# Altium PCB RHD2164_USBC.PcbDoc
Units mm, origin at the board's own origin, x right, y up, seen from the top; angles counter-clockwise.
Board outline 26.31 x 34.44 mm, 6 copper layers (Top Layer, Ground Plane 1, Third Layer, Fourth Layer, Ground Plane 2, Bottom Layer), stack 1.484 mm thick; 12 components, 76 nets, 224 pads, 85 vias.
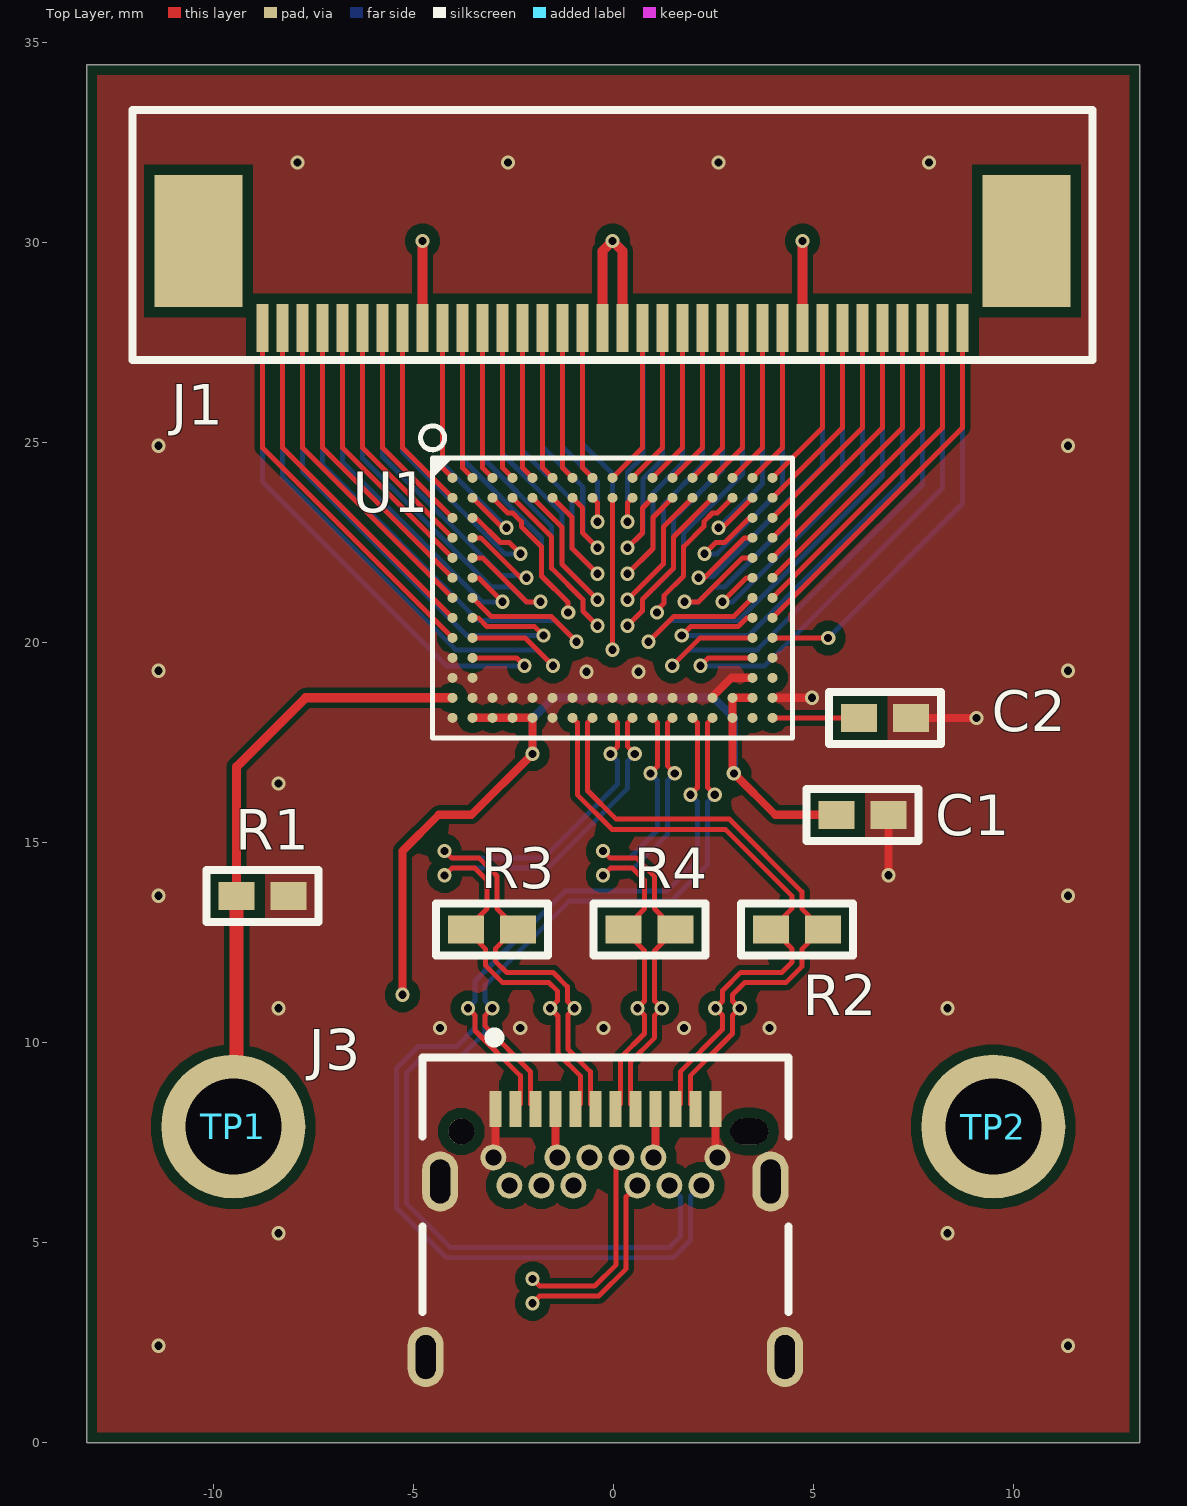
[diagram p0: Top Layer view]
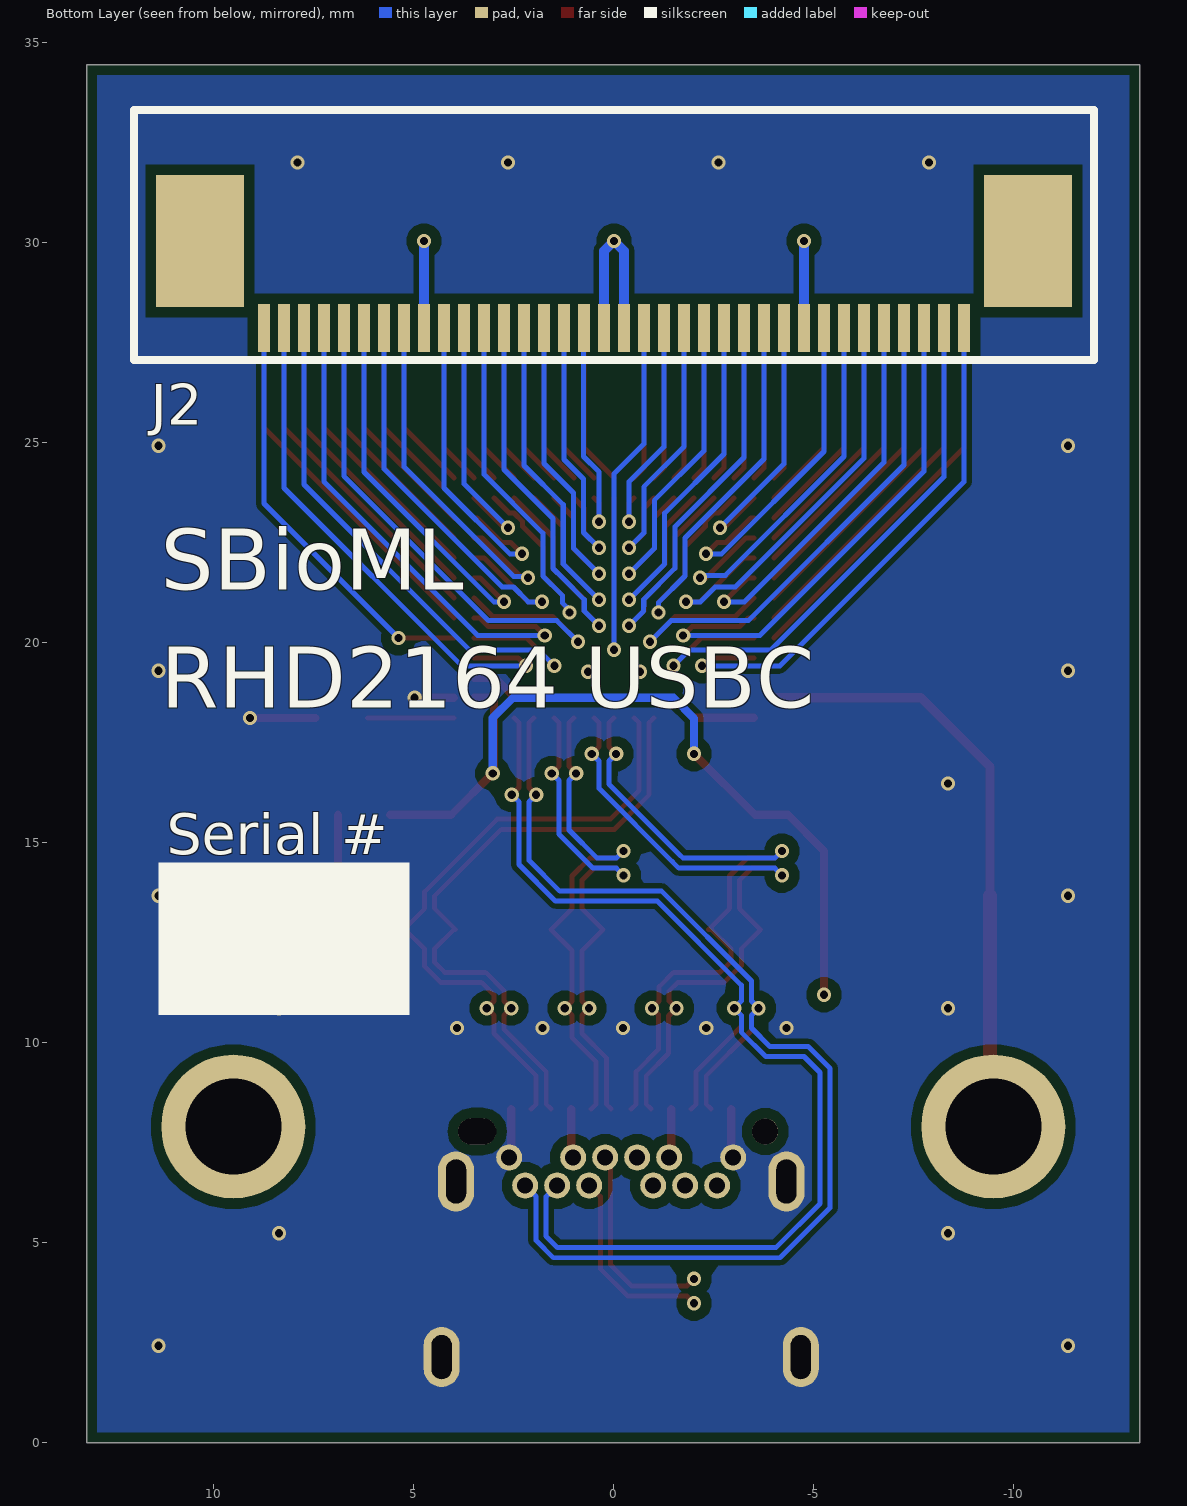
[diagram p1: Bottom Layer view, seen from below]
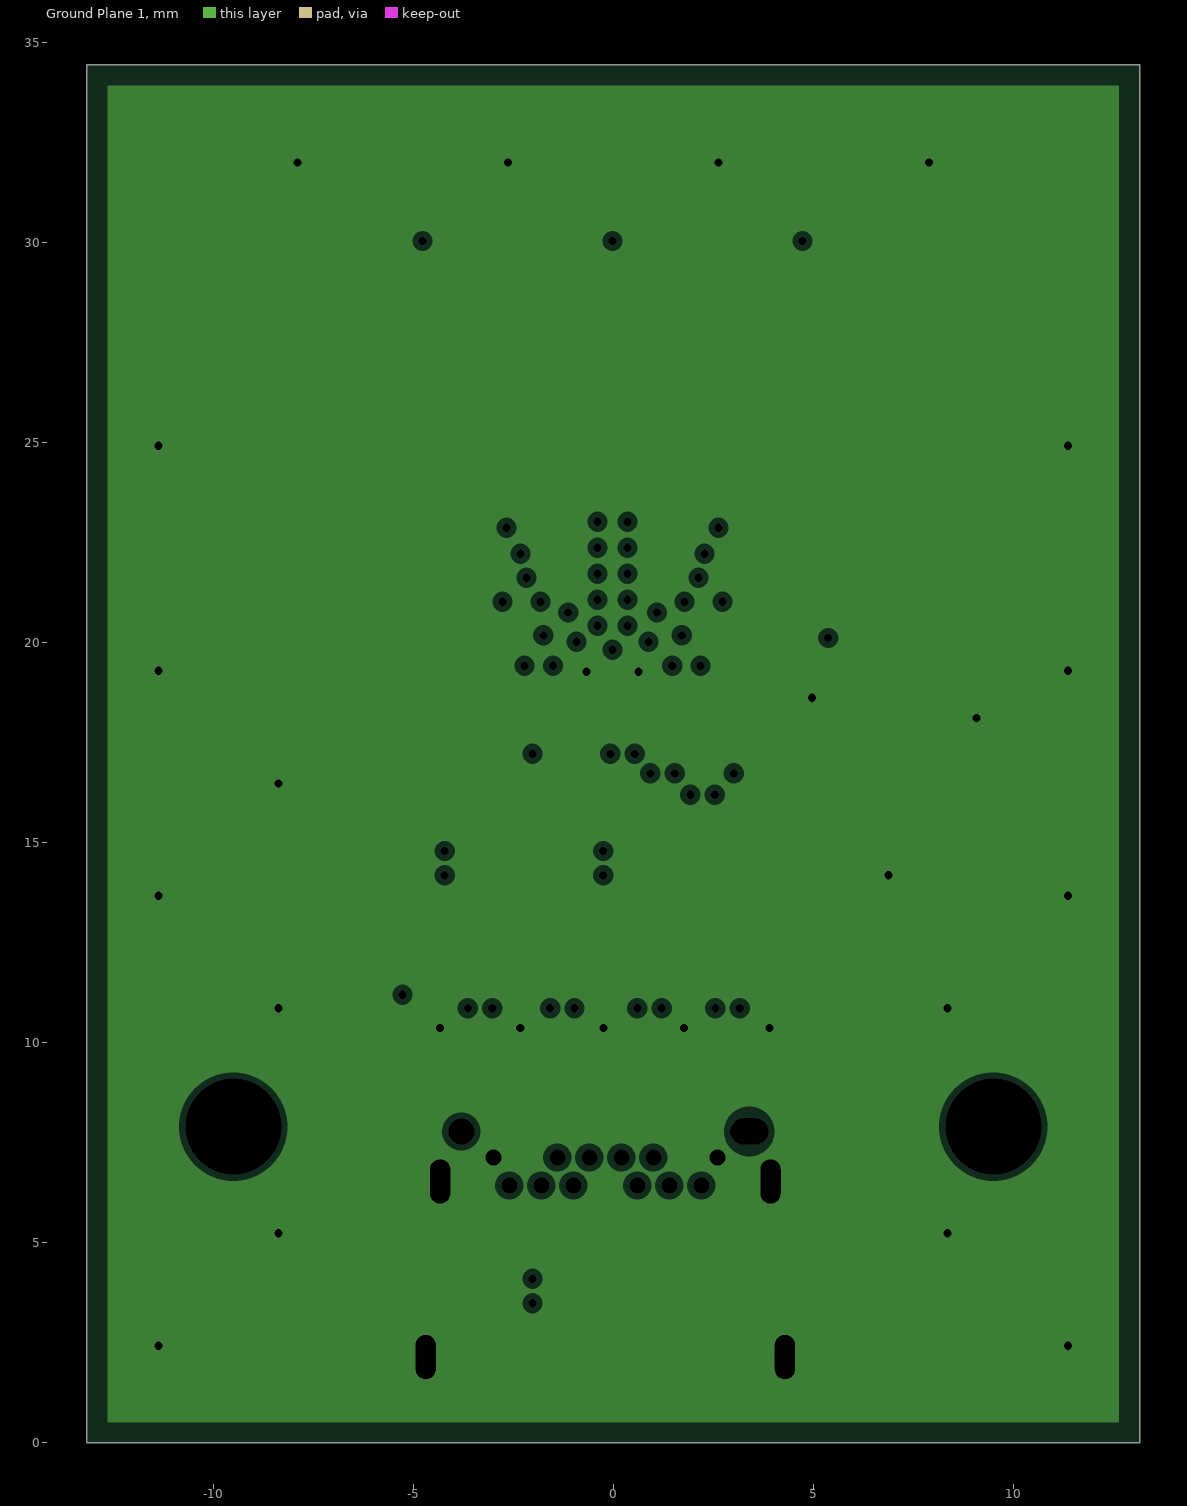
[diagram p2: Ground Plane 1, clearances drawn from the general rule]
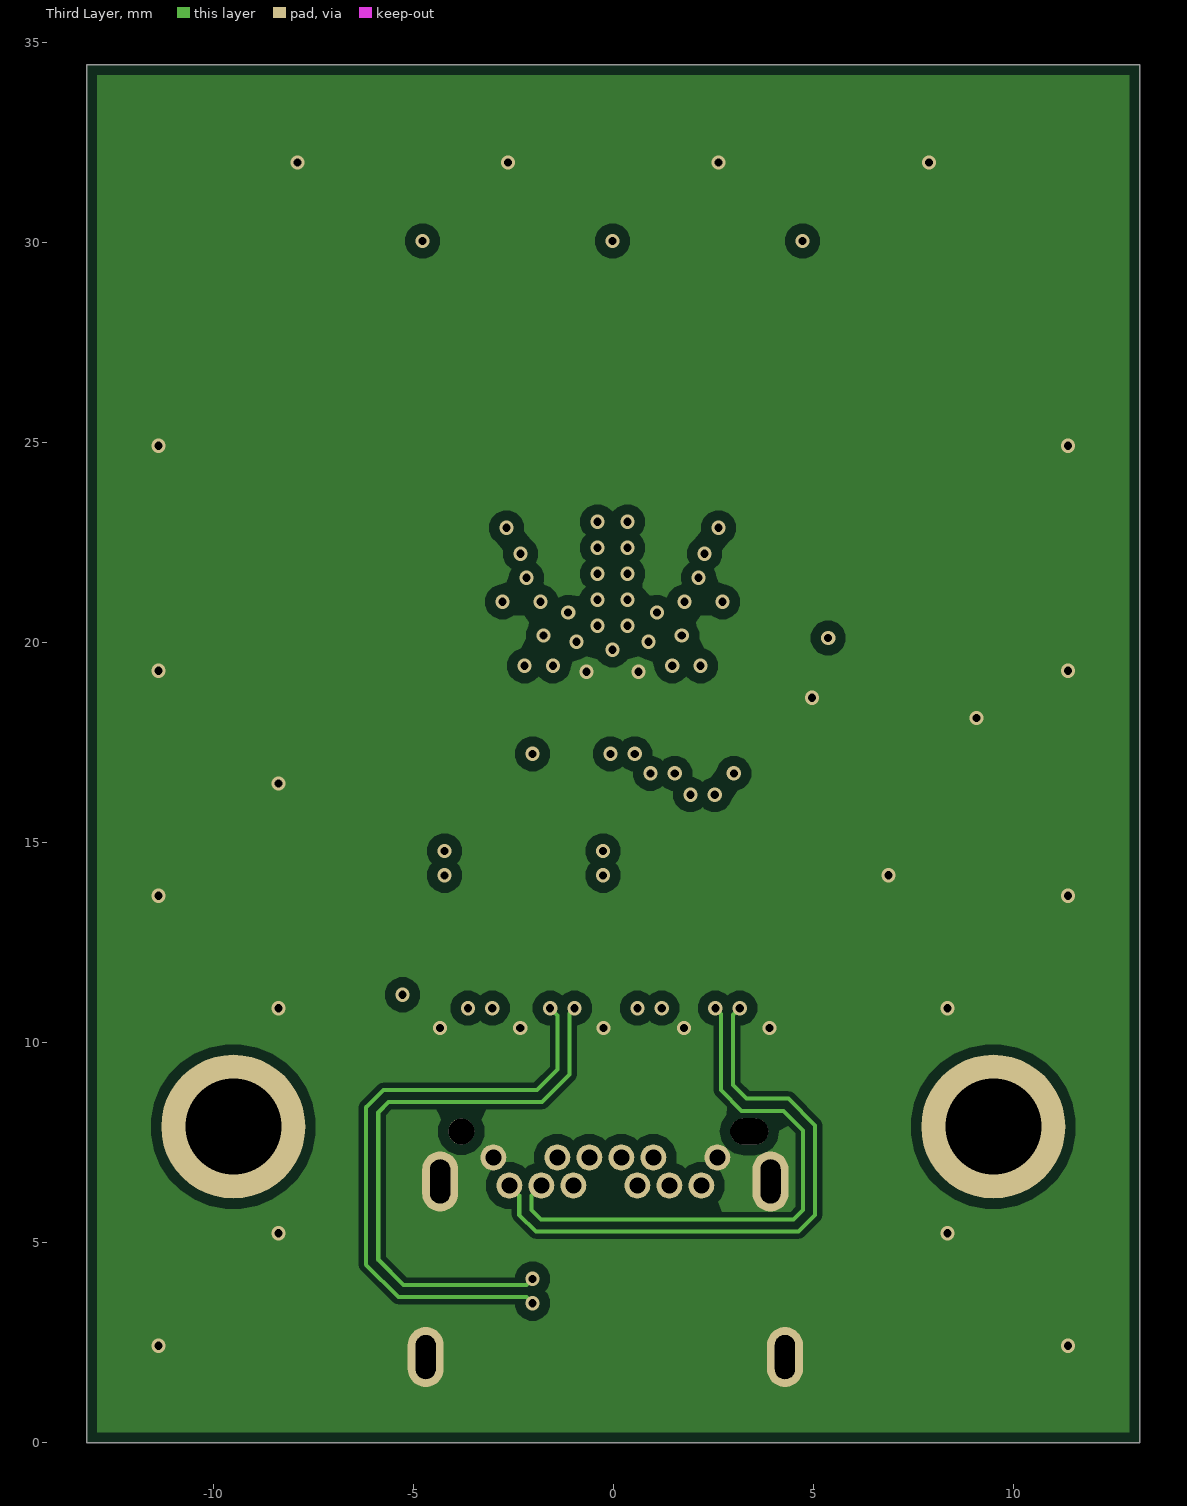
[diagram p3: Third Layer]
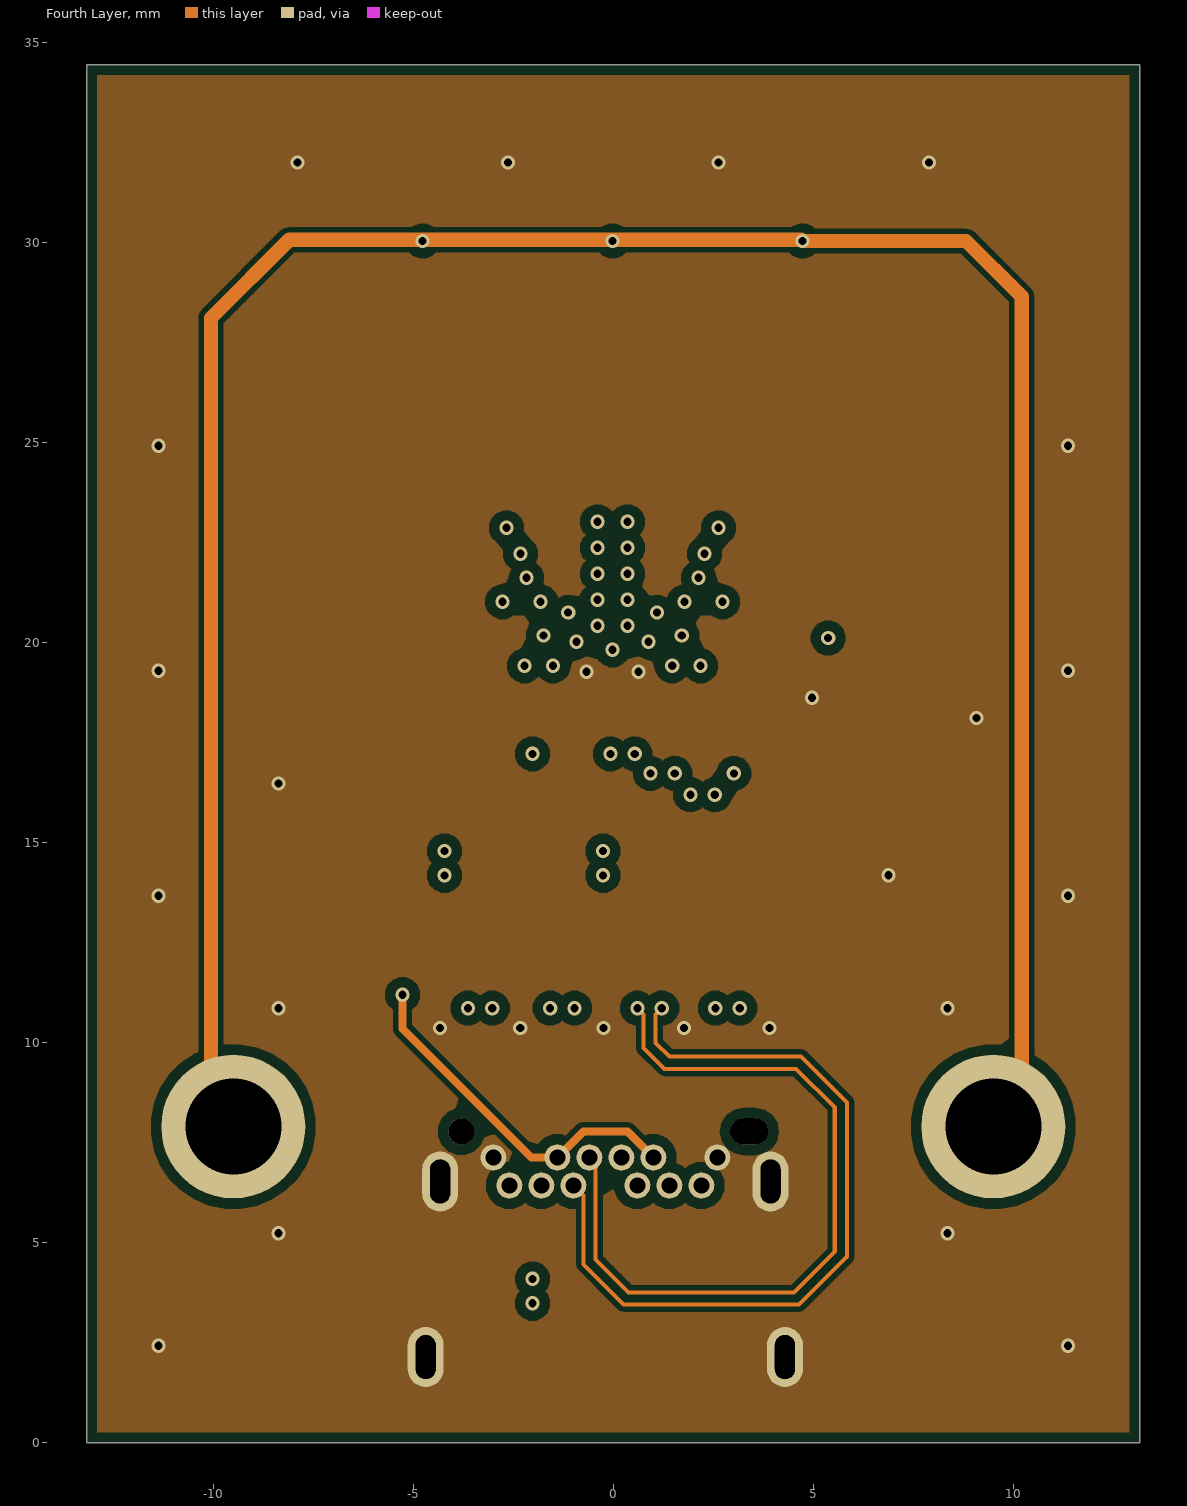
[diagram p4: Fourth Layer]
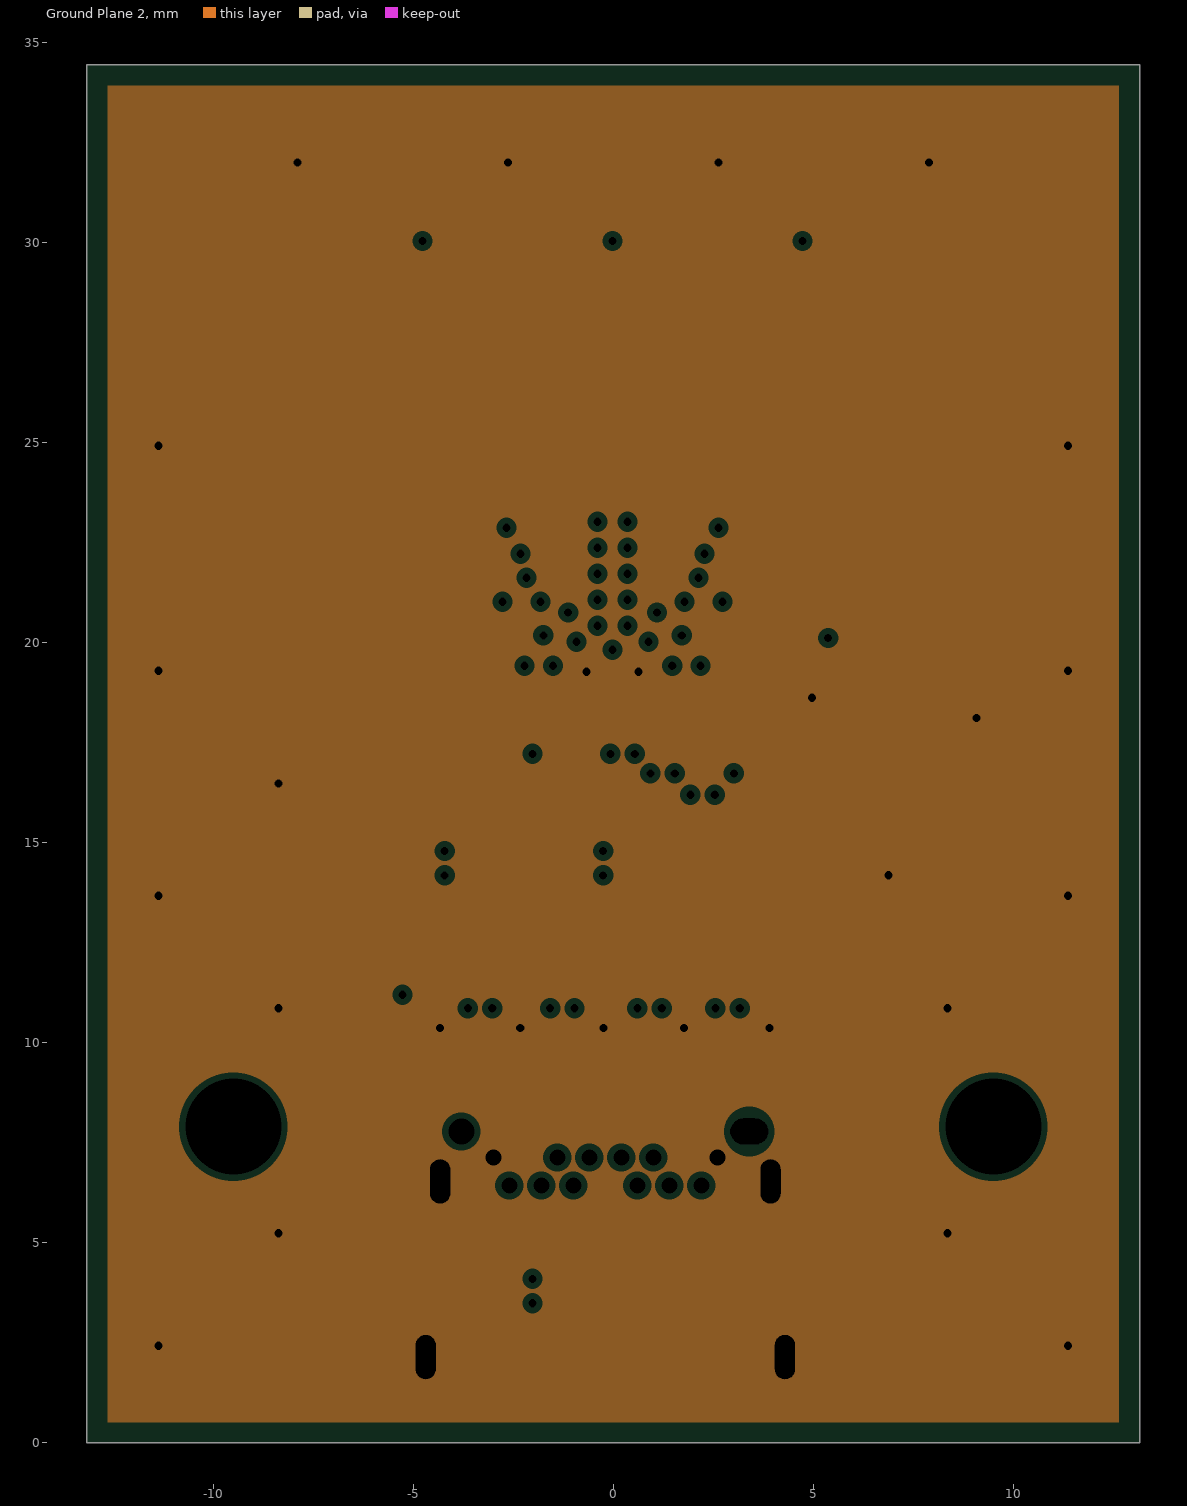
[diagram p5: Ground Plane 2, clearances drawn from the general rule]

## Layer stack, top to bottom
Top Solder: solder mask 0.01, Solder Resist, Dk 3.5
Top Layer: signal copper 0.035
Dielectric 4: prepreg 0.1195, 2116 RC58%, Dk 4.45
Ground Plane 1: plane copper 0.035, net GND
Dielectric 2: core 0.43, Core, Dk 4.6
Third Layer: signal copper 0.035
Dielectric 1: prepreg 0.175, 7628 RC46%, Dk 4.74
Fourth Layer: signal copper 0.035
Dielectric 3: core 0.43, Core, Dk 4.6
Ground Plane 2: plane copper 0.035, net GND
Dielectric 5: prepreg 0.1195, 2116 RC58%, Dk 4.45
Bottom Layer: signal copper 0.035
Bottom Solder: solder mask 0.01, Solder Resist, Dk 3.5

## Board outline
-13.157,0 -13.157,34.442 13.157,34.442 13.157,0

## Design rules (kind name [scope] priority, off if disabled: settings)
AcuteAngle [All] p1: minimum=4.50000000000000E+0001 checktracksonly=FALSE
BoardOutlineClearance [All] p1: gap=0.254 ignorepadtopadclearanceinfootprint=FALSE
Clearance [All] p1: gap=0.254 ignorepadtopadclearanceinfootprint=TRUE except(0.127: Arc-Arc Arc-Track Arc-SMDPad Arc-THPad Arc-Via Arc-Fill Arc-Poly Arc-Region Arc-Text Arc-Hole Track-Track Track-SMDPad Track-THPad Track-Via Track-Fill Track-Poly Track-Region Track-Text Track-Hole)
ComponentClearance [All] p1: gap=0.102 collisioncheckmode=3 verticalgap=0.102 showdistances=FALSE
DiffPairsRouting [All] p1: maxlimit=0.203 minlimit=0.127 mostfreqgap=0.203 toplayer_maxgap=0.127 toplayer_prefgap=0.127 toplayer_minwidth=0.124 toplayer_maxwidth=0.124 toplayer_prefwidth=0.124 midlayer2_mingap=0.203 midlayer2_minwidth=0.102 midlayer2_maxwidth=0.102 midlayer2_prefwidth=0.102 midlayer3_mingap=0.203 midlayer3_minwidth=0.102 midlayer3_maxwidth=0.102 midlayer3_prefwidth=0.102 bottomlayer_maxgap=0.127 bottomlayer_prefgap=0.127 bottomlayer_minwidth=0.124 bottomlayer_maxwidth=0.124 bottomlayer_prefwidth=0.124 impedanceprofiledriven=TRUE impedanceprofileid={EA2CEC0D-C804-4875-A771-53543DD9646E} impedanceprofilevalue=100.000000 maxuncoupledlength=5.08
HoleSize [All] p1: absolutevalues=TRUE maxlimit=25.4 minlimit=0.152 maxpercent=80.000 minpercent=20.000
HoleToHoleClearance [All] p1: gap=0.203 allowstackedmicrovias=FALSE
MatchedLengths [All] p1: tolerance=1.27 checknetsindiffpair=TRUE checkdiffpairvsdiffpair=FALSE checkxsignals=FALSE checkothers=FALSE
MinimumAnnularRing [All] p1: minimumring=0.076
MinimumSolderMaskSliver MinimumSolderMaskSliver_U1 [HasFootprint('RHD2164_BGA')] p1: minsoldermaskwidth=0.025
MinimumSolderMaskSliver [All] p2: minsoldermaskwidth=0.102
PlaneClearance [All] p1: clearance=0.152
PlaneConnect [All] p1: planeconnectstyle=Direct reliefexpansion=0.508 reliefentries=4 reliefconductorwidth=0.254 reliefairgap=0.254
PolygonConnect [All] p1: connectstyle=Direct reliefconductorwidth=0.203 reliefentries=4 polygonreliefangle="90 Angle" airgapwidth=0.102
RoutingVias [All] p1: holewidth=0.203 width=0.356 viastyle="Through Hole" minholewidth=0.152 minwidth=0.356 maxholewidth=0.203 maxwidth=0.356
SilkToSilkClearance [All] p1: silktosilkclearance=0.102
SilkToSolderMaskClearance [IsPad] p1: minsilkscreentomaskgap=0.051 clearancetoexposedcopper=FALSE
SolderMaskExpansion SolderMaskExpansion_Vias [IsVia] p1: expansion=-0.254 istentingtop=TRUE
SolderMaskExpansion [All] p2: expansion=0.102 istentingtop=FALSE
SupplyNets "Schematic Supply Nets_1" [InNet('GND')] p1: voltage=0.000
SupplyNets "Schematic Supply Nets" [InNet('VCC')] p2: voltage=0.000
Width Width_Power [InNetClass('Power')] p1: maxlimit=0.508 minlimit=0.152 preferedwidth=0.203
Width [All] p2: maxlimit=0.381 minlimit=0.127 preferedwidth=0.127 minimp=50.000000 maximp=50.000000 favimp=50.000000
21 further rules are at their usual default settings.

## Classes and differential pairs
component class RHD2164_USBC: C1 C2 J1 J2 J3 R1 R2 R3 R4 U1
differential pair RHD2216_SCLK: +RHD2216_SCLK_P -RHD2216_SCLK_N
differential pair RHD2216_MOSI: +RHD2216_MOSI_P -RHD2216_MOSI_N
differential pair RHD2216_MISO: +RHD2216_MISO_P -RHD2216_MISO_N
differential pair RHD2216_CSN: +RHD2216_CSN_P -RHD2216_CSN_N

## Components (designator, comment, footprint, x,y, rotation, side; value= is the part's Value field where it differs from the comment)
C1 "Value" 0402_CAPACITOR 6.232,15.698 r180 top
C2 "Value" 0402_CAPACITOR 6.795,18.114 r0 top
J1 "3-2492104-6" CON_ZIF_RA_36POS -0.018,27.872 r180 top locked
J2 "3-2492104-6" CON_ZIF_RA_36POS -0.018,27.872 r0 bottom locked
J3 "217183-0001" FP-217183-0001-MFG -0.199,4.545 r0 top locked
R1 "Value" 0402_Resistor -8.768,13.672 r180 top
R2 "Value" 0402_Resistor 4.589,12.827 r180 top
R3 "Value" 0402_Resistor -3.031,12.827 r0 top
R4 "Value" 0402_Resistor 0.906,12.827 r0 top
TP1 "TP_Small" TP_Small_M2#1 -10.457,7.78 r0 top
TP2 "TP_Small" TP_Small_M2#2 9.702,7.9 r0 top
U1 "Intan Technologies RHD2164 chip, BGA package (9x7mm 104-pin)" RHD2164_BGA -0.018,21.122 r0 top locked

## Footprints (in the part's own frame and the unit in brackets; to place one, negate y for a bottom-side part, rotate by r counter-clockwise, add the part's x,y. Pads: shape width x height; smd on the part's side, far side on the other; paste and mask are expansions set on the pad)
0402_CAPACITOR [mm]
  rect 0.9x0.7 smd: 1(-0.65,0) 2(0.65,0)
  silkscreen extent -1.4,-0.65 1.4,0.65
0402_Resistor [mm]
  rect 0.9x0.7 smd: 1(-0.65,0) 2(0.65,0)
  silkscreen extent -1.4,-0.65 1.4,0.65
CON_ZIF_RA_36POS [mm] "3-2492104-6 / 36 Position FPC Connector Contacts, Bottom 0.020\" (0.50mm) Surface Mount, Right Angle"
  rect 0.3x1.2 smd mask+0: 1(-8.75,0) 2(-8.25,0) 3(-7.75,0) 4(-7.25,0) 5(-6.75,0) 6(-6.25,0) 7(-5.75,0) 8(-5.25,0) 9(-4.75,0) 10(-4.25,0) 11(-3.75,0) 12(-3.25,0) 13(-2.75,0) 14(-2.25,0) 15(-1.75,0) 16(-1.25,0) 17(-0.75,0) 18(-0.25,0) 19(0.25,0) 20(0.75,0) 21(1.25,0) 22(1.75,0) 23(2.25,0) 24(2.75,0) 25(3.25,0) 26(3.75,0) 27(4.25,0) 28(4.75,0) 29(5.25,0) 30(5.75,0) 31(6.25,0) 32(6.75,0) 33(7.25,0) 34(7.75,0) 35(8.25,0) 36(8.75,0)
  rect 2.2x3.3 smd mask+0: M1(-10.35,-2.17) M2(10.35,-2.17)
  silkscreen extent -12,-5.45 12,0.8
FP-217183-0001-MFG [mm]
  rrect100% 0.9x1.5 hole 1.1 slot 0.5 at 0 deg paste-2539.97 mask+0: 1(-4.13,1.985) 2(4.13,1.985) 3(-4.49,-2.405) 4(4.49,-2.405)
  rect 0.3x0.9 smd paste+0 mask+0: A1(-2.75,3.795) A2(-2.25,3.795) A3(-1.75,3.795) A4(-1.25,3.795) A5(-0.75,3.795) A6(-0.25,3.795) A7(0.25,3.795) A8(0.75,3.795) A9(1.25,3.795) A10(1.75,3.795) A11(2.25,3.795) A12(2.75,3.795)
  round 0.65 hole 0.4 paste-2539.97 mask+0: B1(2.8,2.585) B2(2.4,1.885) B3(1.6,1.885) B4(1.2,2.585) B5(0.8,1.885) B6(0.4,2.585) B7(-0.4,2.585) B8(-0.8,1.885) B9(-1.2,2.585) B10(-1.6,1.885) B11(-2.4,1.885) B12(-2.8,2.585)
  round 0.65 hole 0.65 unplated paste-2539.97 mask+0: ""(-3.6,3.235)
  rrect100% 0.95x0.65 hole 0.65 slot 0.95 at 0 deg unplated paste-2539.97 mask+0: ""(3.6,3.235)
  silkscreen extent -4.57,-1.28 4.57,5.71, body extent -5.04,-5.19 5.04,5.19, height 0.25
RHD2164_BGA [mm]
  rrect100% 0.25x0.25 smd: A1(-4,3) A2(-3.5,3) A3(-3,3) A4(-2.5,3) A5(-2,3) A6(-1.5,3) A7(-1,3) A8(-0.5,3) A9(0,3) A10(0.5,3) A11(1,3) A12(1.5,3) A13(2,3) A14(2.5,3) A15(3,3) A16(3.5,3) A17(4,3) B1(-4,2.5) B2(-3.5,2.5) B3(-3,2.5) B4(-2.5,2.5) B5(-2,2.5) B6(-1.5,2.5) B7(-1,2.5) B8(-0.5,2.5) B9(0,2.5) B10(0.5,2.5) B11(1,2.5) B12(1.5,2.5) B13(2,2.5) B14(2.5,2.5) B15(3,2.5) B16(3.5,2.5) B17(4,2.5) C1(-4,2) C2(-3.5,2) C16(3.5,2) C17(4,2) D1(-4,1.5) D2(-3.5,1.5) D16(3.5,1.5) D17(4,1.5) E1(-4,1) E2(-3.5,1) E16(3.5,1) E17(4,1) F1(-4,0.5) F2(-3.5,0.5) F16(3.5,0.5) F17(4,0.5) G1(-4,0) G2(-3.5,0) G16(3.5,0) G17(4,0) H1(-4,-0.5) H2(-3.5,-0.5) H16(3.5,-0.5) H17(4,-0.5) J1(-4,-1) J2(-3.5,-1) J16(3.5,-1) J17(4,-1) K1(-4,-1.5) K2(-3.5,-1.5) K16(3.5,-1.5) K17(4,-1.5) L1(-4,-2) L2(-3.5,-2) L16(3.5,-2) L17(4,-2) M1(-4,-2.5) M2(-3.5,-2.5) M3(-3,-2.5) M4(-2.5,-2.5) M5(-2,-2.5) M6(-1.5,-2.5) M7(-1,-2.5) M8(-0.5,-2.5) M9(0,-2.5) M10(0.5,-2.5) M11(1,-2.5) M12(1.5,-2.5) M13(2,-2.5) M14(2.5,-2.5) M15(3,-2.5) M16(3.5,-2.5) M17(4,-2.5) N1(-4,-3) N2(-3.5,-3) N3(-3,-3) N4(-2.5,-3) N5(-2,-3) N6(-1.5,-3) N7(-1,-3) N8(-0.5,-3) N9(0,-3) N10(0.5,-3) N11(1,-3) N12(1.5,-3) N13(2,-3) N14(2.5,-3) N15(3,-3) N16(3.5,-3) N17(4,-3)
  silkscreen extent -4.8,-3.5 4.5,4.3
TP_Small_M2#1 [mm]
  round 3.6 hole 2.4: 1(0.957,0.12)
TP_Small_M2#2 [mm]
  round 3.6 hole 2.4: 1(-0.202,0)

## Part data
C1 C2: library part Capacitor, "Capacitor"
J1 J2: library part CON_ZIF_RA_36POS, "36 Position FPC Connector Contacts, Bottom 0.020\" (0.50mm) Surface Mount, Right Angle", GRAMS Lib Spec=2.7
J3: library part CON_USBC_TH_SMT, "USB-C (USB TYPE-C) USB 3.2 Gen 1 (USB 3.1 Gen 1, Superspeed (USB 3.0)) Receptacle Connector 24 Position Through Hole, Right Angle"
R1 R2 R3 R4: library part Resistor, "Resistor", GRAMS Lib Spec=2.7
U1: library part RHD2164_BGA_BGA, Package=BGA104_9X7, DeviceName=_BGA, DeviceSetName=RHD2164_BGA, GateName_1=A, LibraryName=RHD2000, SymbolName_1=RHD2164_BGA

## Via types
v1: diameter 0.356/0.356/0.356/0.356 (per signal layer), hole 0.203, Top Layer to Bottom Layer, tented both sides, 46 vias
v2: diameter 0.356, hole 0.203, Top Layer to Bottom Layer, tented both sides, 39 vias

## Nets (pads, with @x,y where several pads share a name; then routed paths per layer and width w, separated by ;. In a path a pad name is that pad's centre, name@x,y a point inside that pad or via, vN(x,y) a via of type N, cw(c..) or ccw(c..) an arc to the next point about the centre after c; other vN are vias at no path point)
GND: C1.1 C2.2 J3.1 J3.2 J3.3 J3.4 J3.A1 J3.A12 J3.B1 J3.B12 R1.1 U1.K1 U1.K17 U1.L1 U1.L2 U1.L16 U1.M2 U1.M3 U1.M4 U1.M5 U1.M6 U1.M7 U1.M8 U1.M9 U1.M10 U1.M11 U1.M12 U1.M13 U1.M14 U1.M17 U1.N1 U1.N6 | length 7.8
  Top Layer w0.203: J3.B12 -2.949,7.18 J3.A1 ; U1.M14 2.483,18.649 2.955,19.122 U1.L16 ; J3.A12 2.551,7.18 J3.B1 ; U1.M17 v2(4.966,18.622) ; v2(6.882,14.185) C1.1 ; C2.2 v2(9.081,18.114)
  other v1: -11.368,2.422 -8.368,5.235 -8.368,10.862 -11.368,13.672 -8.368,16.482 -0.668,19.272 0.632,19.272 -11.368,19.297 11.367,19.297 -11.368,24.922 11.367,24.922 -7.894,32.004 -2.631,32.004 2.631,32.004 7.894,32.004
  other v2: 11.367,2.422 8.357,5.235 -4.329,10.367 -2.324,10.367 -0.243,10.367 1.766,10.367 3.907,10.367 8.357,10.862 11.367,13.672
INPUT_01: J2.1 U1.K2 | length 13.7
  Top Layer w0.127: U1.K2 -2.417,19.622 v1(-2.218,19.422)
  Bottom Layer w0.127: J2.1 -8.768,24.023 -4.167,19.422 v1(-2.218,19.422)
INPUT_02: J1.36 U1.J1 | length 9.7
  Top Layer w0.127: J1.36 -8.768,24.872 U1.J1
INPUT_03: J2.2 U1.J2 | length 14.7
  Top Layer w0.127: U1.J2 -2.208,20.122 v1(-1.509,19.422)
  Bottom Layer w0.127: J2.2 -8.268,24.149 -3.941,19.822 -1.908,19.822 v1(-1.509,19.422)
INPUT_04: J1.35 U1.H1 | length 9
  Top Layer w0.127: J1.35 -8.268,24.872 U1.H1
INPUT_05: J2.3 U1.H2 | length 13.3
  Top Layer w0.127: U1.H2 -3.377,20.622 -3.155,20.4 -1.965,20.4 v1(-1.748,20.182)
  Bottom Layer w0.127: J2.3 -7.768,24.286 -3.663,20.182 v1(-1.748,20.182)
INPUT_06: J1.34 U1.G1 | length 8.3
  Top Layer w0.127: J1.34 -7.768,24.872 U1.G1
INPUT_07: J2.4 U1.G2 | length 14.7
  Top Layer w0.127: U1.G2 -3.05,20.654 -1.549,20.654 v1(-0.918,20.022)
  Bottom Layer w0.127: J2.4 -7.268,24.444 -3.374,20.551 -1.9,20.551 -1.446,20.551 v1(-0.918,20.022)
INPUT_08: J1.33 U1.F1 | length 7.6
  Top Layer w0.127: J1.33 -7.268,24.872 U1.F1
INPUT_09: J2.5 U1.F2 | length 9.8
  Top Layer w0.127: U1.F2 -3.368,21.622 v1(-2.768,21.022)
  Bottom Layer w0.127: J2.5 -6.768,24.509 -3.281,21.022 v1(-2.768,21.022)
INPUT_10: J1.32 U1.E1 | length 6.9
  Top Layer w0.127: J1.32 -6.768,24.872 U1.E1
INPUT_11: J2.6 U1.E2 | length 11.4
  Top Layer w0.127: U1.E2 -3.268,22.122 -2.168,21.022 v1(-1.818,21.022)
  Bottom Layer w0.127: J2.6 -6.268,24.61 -3.048,21.391 -2.55,21.391 -2.181,21.022 v1(-1.818,21.022)
INPUT_12: J1.31 U1.D1 | length 6.2
  Top Layer w0.127: J1.31 -6.268,24.872 U1.D1
INPUT_13: J2.7 U1.D2 | length 9.8
  Top Layer w0.127: U1.D2 -3.316,22.622 -2.316,21.622 v1(-2.168,21.622)
  Bottom Layer w0.127: J2.7 -5.768,24.652 -2.8,21.685 -2.23,21.685 v1(-2.168,21.622)
INPUT_14: J1.30 U1.C1 | length 5.5
  Top Layer w0.127: J1.30 -5.768,24.872 U1.C1
INPUT_15: J2.8 U1.C2 | length 8.7
  Top Layer w0.127: U1.C2 -3.438,23.122 -2.82,22.504 -2.599,22.504 v1(-2.318,22.222)
  Bottom Layer w0.127: J2.8 -5.268,24.78 -2.71,22.222 v1(-2.318,22.222)
INPUT_16: J1.29 U1.B1 | length 4.8
  Top Layer w0.127: J1.29 -5.268,24.872 U1.B1
INPUT_17: J1.27 U1.A1 | length 3.9
  Top Layer w0.127: J1.27 -4.268,24.372 U1.A1
INPUT_18: J2.10 U1.B2 | length 6.8
  Top Layer w0.127: U1.B2 -2.768,22.872 v1(-2.668,22.872)
  Bottom Layer w0.127: J2.10 -4.268,24.472 v1(-2.668,22.872)
INPUT_19: J1.26 U1.A2 | length 3.9
  Top Layer w0.127: J1.26 -3.768,24.372 U1.A2
INPUT_20: J2.11 U1.B3 | length 11.9
  Top Layer w0.127: U1.B3 -2.636,23.241 -2.515,23.241 -2.299,23.025 -2.299,22.904 -1.794,22.399 -1.794,21.67 -1.127,21.003 -1.127,20.815 v1(-1.127,20.753)
  Bottom Layer w0.127: J2.11 -3.768,24.591 -1.795,22.619 -1.795,21.668 -1.127,21 -1.127,20.816 v1(-1.127,20.753)
INPUT_21: J1.25 U1.A3 | length 3.9
  Top Layer w0.127: J1.25 -3.268,24.372 U1.A3
INPUT_22: J2.12 U1.B4 | length 12.7
  Top Layer w0.127: U1.B4 -1.54,22.645 -1.54,21.86 -0.761,21.081 -0.761,20.791 v1(-0.393,20.422)
  Bottom Layer w0.127: J2.12 -3.268,24.627 -1.541,22.9 -1.541,21.862 -1.54,21.861 -0.761,21.081 -0.761,20.92 -0.759,20.918 -0.759,20.79 v1(-0.393,20.422)
INPUT_23: J1.24 U1.A4 | length 3.9
  Top Layer w0.127: J1.24 -2.768,24.372 U1.A4
INPUT_24: J2.13 U1.B5 | length 11
  Top Layer w0.127: U1.B5 -2.001,23.606 -1.286,22.891 -1.286,21.966 v1(-0.393,21.072)
  Bottom Layer w0.127: J2.13 -2.768,24.719 -1.286,23.238 -1.286,21.965 v1(-0.393,21.072)
INPUT_25: J1.23 U1.A5 | length 3.9
  Top Layer w0.127: J1.23 -2.268,24.372 U1.A5
INPUT_26: J2.14 U1.B6 | length 9.3
  Top Layer w0.127: U1.B6 -1.027,23.131 -1.027,22.356 v1(-0.393,21.722)
  Bottom Layer w0.127: J2.14 -2.268,24.798 -1.027,23.558 -1.027,22.357 v1(-0.393,21.722)
INPUT_27: J1.22 U1.A6 | length 3.9
  Top Layer w0.127: J1.22 -1.768,24.372 U1.A6
INPUT_28: J2.15 U1.B7 | length 7.6
  Top Layer w0.127: U1.B7 -0.765,23.37 -0.765,22.745 v1(-0.393,22.372)
  Bottom Layer w0.127: J2.15 -1.768,24.9 -0.764,23.896 -0.764,22.744 v1(-0.393,22.372)
INPUT_29: J1.21 U1.A7 | length 3.9
  Top Layer w0.127: J1.21 -1.268,24.372 U1.A7
INPUT_30: J2.16 U1.B8 | length 5.9
  Top Layer w0.127: U1.B8 -0.393,23.497 v1(-0.393,23.022)
  Bottom Layer w0.127: J2.16 -1.268,24.898 -0.393,24.023 v1(-0.393,23.022)
INPUT_31: J1.20 U1.A8 | length 3.9
  Top Layer w0.127: J1.20 -0.768,24.372 U1.A8
INPUT_32: J2.17 U1.B9 | length 12.2
  Top Layer w0.127: v1(-0.018,19.822) U1.B9
  Bottom Layer w0.127: J2.17 -0.768,24.972 -0.018,24.222 v1(-0.018,19.822)
INPUT_33: J1.17 U1.A9 | length 4.1
  Top Layer w0.127: U1.A9 0.732,24.872 J1.17
INPUT_34: J1.16 U1.A10 | length 4.1
  Top Layer w0.127: U1.A10 1.232,24.872 J1.16
INPUT_35: J2.20 U1.B10 | length 5.7
  Top Layer w0.127: v1(0.358,23.022) 0.358,23.497 U1.B10
  Bottom Layer w0.127: v1(0.358,23.022) 0.358,24.271 0.743,24.656 0.743,27.862 J2.20
INPUT_36: J1.15 U1.A11 | length 4.1
  Top Layer w0.127: U1.A11 1.732,24.872 J1.15
INPUT_37: J2.21 U1.B11 | length 7.4
  Top Layer w0.127: v1(0.358,22.372) 0.73,22.745 0.73,23.37 U1.B11
  Bottom Layer w0.127: v1(0.358,22.372) 0.743,22.757 0.743,24.09 1.232,24.58 J2.21
INPUT_38: J1.14 U1.A12 | length 4.1
  Top Layer w0.127: U1.A12 2.232,24.872 J1.14
INPUT_39: J2.22 U1.B12 | length 9.1
  Top Layer w0.127: v1(0.358,21.722) 0.992,22.356 0.992,23.131 U1.B12
  Bottom Layer w0.127: v1(0.358,21.722) 0.997,22.361 0.997,23.741 1.732,24.477 J2.22
INPUT_40: J1.13 U1.A13 | length 4.1
  Top Layer w0.127: U1.A13 2.732,24.872 J1.13
INPUT_41: J2.23 U1.B13 | length 10.8
  Top Layer w0.127: v1(0.357,21.072) 1.251,21.966 1.251,22.891 1.966,23.606 U1.B13
  Bottom Layer w0.127: v1(0.357,21.072) 1.251,21.965 1.251,23.45 2.232,24.432 J2.23
INPUT_42: J1.12 U1.A14 | length 4.1
  Top Layer w0.127: U1.A14 3.232,24.872 J1.12
INPUT_43: J2.24 U1.B14 | length 12.5
  Top Layer w0.127: v1(0.358,20.422) 0.726,20.791 0.726,21.081 1.505,21.86 1.505,22.645 U1.B14
  Bottom Layer w0.127: v1(0.358,20.422) 0.726,20.79 0.726,21.075 1.253,21.603 ; 1.253,21.604 1.506,21.856 1.506,23.102 2.732,24.329 J2.24
INPUT_44: J1.11 U1.A15 | length 4.1
  Top Layer w0.127: U1.A15 3.732,24.872 J1.11
INPUT_45: J2.25 U1.B15 | length 11.7
  Top Layer w0.127: v1(1.092,20.753) 1.092,20.815 1.273,20.995 1.273,21.183 1.759,21.67 1.759,22.399 2.264,22.904 2.264,23.025 2.48,23.241 2.601,23.241 U1.B15
  Bottom Layer w0.127: v1(1.092,20.753) 1.092,20.817 1.273,20.998 1.273,21.183 1.76,21.669 1.76,22.738 3.232,24.21 J2.25
INPUT_46: J1.10 U1.A16 | length 4.1
  Top Layer w0.127: U1.A16 4.232,24.872 J1.10
INPUT_47: J2.26 U1.B16 | length 6.6
  Top Layer w0.127: v1(2.633,22.872) 2.733,22.872 U1.B16
  Bottom Layer w0.127: v1(2.633,22.872) 3.732,23.972 J2.26
INPUT_48: J1.8 U1.A17 | length 4.3
  Top Layer w0.127: U1.A17 5.232,25.372 J1.8
INPUT_49: J1.7 U1.B17 | length 5
  Top Layer w0.127: U1.B17 5.732,25.372 J1.7
INPUT_50: J2.27 U1.C16 | length 8.2
  Top Layer w0.127: v1(2.283,22.222) 2.564,22.504 2.785,22.504 3.403,23.122 U1.C16
  Bottom Layer w0.127: v1(2.283,22.222) 2.586,22.222 4.232,23.868 J2.27
INPUT_51: J1.6 U1.C17 | length 5.7
  Top Layer w0.127: U1.C17 6.232,25.372 J1.6
INPUT_52: J2.29 U1.D16 | length 9.4
  Top Layer w0.127: v1(2.133,21.622) 2.281,21.622 3.281,22.622 U1.D16
  Bottom Layer w0.127: v1@2.166,21.656 2.49,21.656 5.232,24.398 J2.29
INPUT_53: J1.5 U1.D17 | length 6.4
  Top Layer w0.127: U1.D17 6.732,25.372 J1.5
INPUT_54: J2.30 U1.E16 | length 11
  Top Layer w0.127: v1(1.783,21.022) 2.133,21.022 3.232,22.122 U1.E16
  Bottom Layer w0.127: v1(1.783,21.022) 2.128,21.022 2.496,21.391 2.778,21.391 5.732,24.345 J2.30
INPUT_55: J1.4 U1.E17 | length 7.1
  Top Layer w0.127: U1.E17 7.232,25.372 J1.4
INPUT_56: J2.31 U1.F16 | length 9.4
  Top Layer w0.127: v1(2.733,21.022) 3.333,21.622 U1.F16
  Bottom Layer w0.127: v1(2.733,21.022) 2.987,21.022 6.232,24.268 J2.31
INPUT_57: J1.3 U1.F17 | length 7.8
  Top Layer w0.127: U1.F17 7.732,25.372 J1.3
INPUT_58: J2.32 U1.G16 | length 14.3
  Top Layer w0.127: v1(0.883,20.022) 1.514,20.654 3.014,20.654 U1.G16
  Bottom Layer w0.127: v1(0.883,20.022) 1.411,20.551 1.865,20.551 3.12,20.551 6.732,24.163 J2.32
INPUT_59: J1.2 U1.G17 | length 8.5
  Top Layer w0.127: U1.G17 8.232,25.372 J1.2
INPUT_60: J2.33 U1.H16 | length 12.9
  Top Layer w0.127: v1(1.713,20.182) 1.93,20.4 3.12,20.4 3.342,20.622 U1.H16
  Bottom Layer w0.127: v1(1.713,20.182) 3.39,20.182 7.232,24.025 J2.33
INPUT_61: J1.1 U1.H17 | length 9.2
  Top Layer w0.127: U1.H17 8.732,25.372 J1.1
INPUT_62: J2.34 U1.J16 | length 14.4
  Top Layer w0.127: v1(1.473,19.422) 2.173,20.122 U1.J16
  Bottom Layer w0.127: v1(1.473,19.422) 1.873,19.822 3.603,19.822 7.732,23.952 J2.34
INPUT_63: J2.36 U1.J17 | length 10.5
  Top Layer w0.127: U1.J17 5.367,20.122 v2(5.372,20.117)
  Bottom Layer w0.127: v2(5.372,20.117) 8.732,23.477 J2.36
INPUT_64: J2.35 U1.K16 | length 13.3
  Top Layer w0.127: v1(2.183,19.422) 2.382,19.622 U1.K16
  Bottom Layer w0.127: v1(2.183,19.422) 3.785,19.422 8.232,23.87 J2.35
NetC2_1: C2.1 U1.N17 | length 2.2
  Top Layer w0.127: U1.N17 6.137,18.122 C2.1
REF: J1.9 J1.18 J1.19 J1.28 J2.9 J2.18 J2.19 J2.28 R1.2 TP1.1 TP2.1 U1.M1 | length 96.1
  Top Layer w0.229: R1.2 -9.418,16.897 -7.692,18.622 U1.M1
  Top Layer w0.254: J1.28 v2(-4.768,30.042) ; J1.19 -0.268,29.792 v2(-0.018,30.042) 0.232,29.792 J1.18 ; J1.9 v2(4.732,30.042)
  Top Layer w0.356: TP1.1 -9.418,7.982 R1.2
  Fourth Layer w0.356: TP1.1 -10.058,8.458 -10.058,28.118 -8.103,30.074 4.701,30.074 v2(4.732,30.042) 8.82,30.042 10.211,28.651 10.211,8.611 TP2.1
  Bottom Layer w0.254: J2.9 v2(-4.768,30.042) ; J2.18 -0.268,29.792 v2(-0.018,30.042) 0.232,29.792 J2.19 ; J2.28 v2(4.732,30.042)
RHD2216_CSN_N: J3.A10 J3.B10 R2.2 U1.N7 | length 30.3
  Top Layer w0.124: U1.N7 -0.897,18.002 -0.897,16.2 -0.033,15.335 2.8,15.335 4.464,13.672 4.464,13.351 R2.2 ; J3.A10 1.676,8.464 1.676,9.277 2.731,10.333 2.731,10.683 v2(2.552,10.862) 2.731,11.041 2.731,11.302 3.188,11.759 4.216,11.759 4.469,12.012 4.469,12.344 R2.2@3.987,12.827
  Third Layer w0.102: J3.B10 -2.046,6.182 -2.046,5.82 -1.81,5.584 4.506,5.584 4.742,5.82 4.742,7.808 4.253,8.297 3.207,8.297 2.692,8.812 2.692,10.722 v2(2.552,10.862)
RHD2216_CSN_P: J3.A11 J3.B11 R2.1 U1.N8 | length 31.4
  Top Layer w0.124: U1.N8 -0.646,17.994 -0.646,16.304 0.071,15.587 2.905,15.587 4.715,13.776 4.715,13.351 R2.1 ; J3.A11 1.927,8.464 1.927,9.173 2.983,10.229 2.983,10.683 v2(3.162,10.862) 2.983,11.041 2.983,11.198 3.292,11.507 4.321,11.507 4.721,11.908 4.721,12.344 R2.1@5.203,12.827
  Third Layer w0.102: J3.B11 -2.351,6.182 -2.351,5.694 -1.937,5.28 4.632,5.28 4.957,5.605 5.047,5.694 5.047,7.935 4.379,8.602 3.333,8.602 2.997,8.938 2.997,10.697 v2(3.162,10.862)
RHD2216_MISO_N: J3.A2 J3.B2 U1.N13 | length 30.4
  Top Layer w0.124: v2(-3.634,10.862) -3.455,10.683 -3.455,10.306 -2.324,9.176 -2.324,8.464 J3.A2 ; v2(1.928,16.2) 2.107,16.379 2.107,17.998 U1.N13
  Bottom Layer w0.124: v2(1.928,16.2) 2.107,16.021 2.107,14.558 1.338,13.79 -1.209,13.79 -3.455,11.543 -3.455,11.041 v2(-3.634,10.862) -3.455,10.683 -3.455,10.367 -3.916,9.906 -4.872,9.906 -5.418,9.36 -5.418,5.871 -4.17,4.623 1.499,4.623 1.932,5.057 1.932,6.161 J3.B2
RHD2216_MISO_P: J3.A3 J3.B3 U1.N14 | length 29.6
  Top Layer w0.124: v2(-3.024,10.862) -3.204,10.683 -3.204,10.411 -2.073,9.28 -2.073,8.464 J3.A3 ; U1.N14 2.358,17.998 2.358,16.379 v2(2.537,16.2)
  Bottom Layer w0.124: J3.B3 1.681,6.151 1.681,5.161 1.394,4.875 -4.066,4.875 -5.167,5.975 -5.167,9.255 -4.768,9.655 -3.812,9.655 -3.204,10.263 -3.204,10.683 v2(-3.024,10.862) -3.204,11.041 -3.204,11.439 -1.105,13.538 1.442,13.538 2.358,14.454 2.358,16.021 v2(2.537,16.2)
RHD2216_MOSI_N: J3.A8 J3.B8 R4.2 U1.N11 | length 32.8
  Top Layer w0.124: v2(-0.254,14.794) -0.075,14.614 0.586,14.614 1.032,14.168 1.032,13.351 R4.2 1.033,12.304 1.033,11.041 v2(1.212,10.862) 1.033,10.683 1.033,10.125 0.426,9.518 0.426,8.465 J3.A8 ; v2(0.928,16.734) 1.107,16.913 1.107,17.998 U1.N11
  Fourth Layer w0.102: J3.B8 -0.749,6.18 -0.749,4.459 0.167,3.544 0.256,3.454 4.647,3.454 5.842,4.649 5.842,8.508 4.698,9.652 1.401,9.652 1.06,9.994 1.06,10.71 v2(1.212,10.862)
  Bottom Layer w0.124: v2(-0.254,14.794) -0.075,14.614 0.404,14.614 1.107,15.317 1.107,16.555 v2(0.928,16.734)
RHD2216_MOSI_P: J3.A7 J3.B7 R4.1 U1.N12 | length 32.4
  Top Layer w0.124: v2(-0.254,14.184) -0.075,14.363 0.482,14.363 0.781,14.064 0.781,13.351 R4.1 0.782,12.302 0.782,11.041 v2(0.603,10.862) 0.782,10.683 0.782,10.229 0.175,9.622 0.175,8.463 J3.A7 ; U1.N12 1.358,17.998 1.358,16.913 v2(1.537,16.734)
  Fourth Layer w0.102: J3.B7 -0.444,6.975 -0.444,6.694 -0.444,6.166 -0.444,4.586 0.383,3.759 4.521,3.759 5.537,4.775 5.537,8.382 4.572,9.347 1.275,9.347 0.755,9.867 0.755,10.71 v2(0.603,10.862)
  Bottom Layer w0.124: v2(-0.254,14.184) -0.075,14.363 0.508,14.363 1.358,15.213 1.358,16.555 v2(1.537,16.734)
RHD2216_SCLK_N: J3.A6 J3.B6 R3.2 U1.N9 | length 36.6
  Top Layer w0.124: v2(-4.216,14.794) -4.037,14.614 -3.351,14.614 -2.905,14.168 -2.905,13.351 R3.2 -2.466,12.827 -2.949,12.344 -2.949,12.04 -2.662,11.753 -1.501,11.753 -1.147,11.399 -1.147,11.041 v2(-0.968,10.862) -1.13,10.7 -1.13,9.835 -0.573,9.277 -0.573,8.464 J3.A6 ; v2(-2.018,4.096) -1.839,3.917 -0.464,3.917 0.071,4.451 0.071,6.999 J3.B6 ; v2(-0.072,17.221) 0.107,17.4 0.107,17.998 U1.N9
  Third Layer w0.102: v2(-2.018,4.096) -2.171,3.943 -5.244,3.943 -5.875,4.574 -5.875,8.259 -5.621,8.513 -1.782,8.513 -1.094,9.201 -1.094,10.736 v2(-0.968,10.862)
  Bottom Layer w0.124: v2(-4.216,14.794) -4.037,14.614 -1.743,14.614 ; -1.691,14.667 0.107,16.464 0.107,17.042 v2(-0.072,17.221)
RHD2216_SCLK_P: J3.A5 J3.B5 R3.1 U1.N10 | length 36.9
  Top Layer w0.124: v2(-4.216,14.184) -4.037,14.363 -3.455,14.363 -3.156,14.064 -3.156,13.351 R3.1 -3.2,12.346 -3.2,11.935 -2.766,11.501 -1.605,11.501 -1.399,11.295 -1.399,11.041 v2(-1.578,10.862) -1.382,10.666 -1.382,9.731 -0.824,9.173 -0.824,8.464 J3.A5 ; v2(-2.018,3.486) -1.839,3.665 -0.36,3.665 0.322,4.347 0.322,6.151 J3.B5 ; U1.N10 0.358,17.998 0.358,17.4 v2(0.537,17.221)
  Third Layer w0.102: v2(-2.018,3.486) -2.169,3.638 -5.371,3.638 -6.18,4.448 -6.18,8.385 -5.748,8.818 -1.908,8.818 -1.399,9.327 -1.399,10.683 v2(-1.578,10.862)
  Bottom Layer w0.124: v2(-4.216,14.184) -4.037,14.363 -1.639,14.363 -1.478,14.524 0.358,16.36 0.358,17.042 v2(0.537,17.221)
VCC: C1.2 J3.A4 J3.A9 J3.B4 J3.B9 U1.M15 U1.M16 U1.N2 U1.N3 U1.N4 U1.N5 U1.N15 | length 34.8
  Top Layer w0.203: v2(-5.268,11.198) -5.268,14.794 -4.363,15.698 -3.541,15.698 v2(-2.018,17.221) U1.N5 U1.N4 U1.N3 U1.N2 ; J3.A4 -1.449,7.18 J3.B9 ; J3.B4 1.051,7.18 J3.A9 ; U1.M16 U1.M15 U1.N15 2.982,16.766 v2(3.015,16.734) 4.05,15.698 C1.2
  Fourth Layer w0.203: v2(-5.268,11.198) -5.268,10.348 -2.05,7.13 J3.B9 -0.749,7.78 0.351,7.78 J3.B4
  Bottom Layer w0.203: v2(-2.018,17.221) -2.018,18.106 -1.501,18.622 2.507,18.622 3.015,18.114 v2(3.015,16.734)
pads on no net: J1.M1 J1.M2 J2.M1 J2.M2 J3. U1.L17 U1.N16

## Polygon pours and split planes (outlines as drawn)
GND on Bottom Layer "GND_BOT" (solid, remove dead copper, pour order 6): -13.157,0 13.157,0 13.157,34.442 -13.157,34.442
GND on Top Layer "GND_TOP" (solid, remove dead copper, pour order 0): -13.157,0 13.157,0 13.157,34.442 -13.157,34.442
GND on Third Layer "GND_L3" (solid, remove dead copper, pour order 4): -13.157,0 13.157,0 13.157,34.442 -13.157,34.442
GND on Fourth Layer "GND_L4" (solid, remove dead copper, pour order 5): -13.157,0 13.157,0 13.157,34.442 -13.157,34.442
GND on Ground Plane 2 (split plane): 12.647,0.51 -12.647,0.51 -12.647,33.932 12.647,33.932
GND on Ground Plane 1 (split plane): 12.647,0.51 -12.647,0.51 -12.647,33.932 12.647,33.932

## Silkscreen, mask and mechanical layers (free items; w line width, h text height)
Bottom Overlay:
  rectangle: 5.094,10.693 11.367,14.503
  text "SBioML" at 11.311,21.326 h1.52
  text "RHD2164 USBC" at 11.311,18.368 h1.52
  text "Serial #" at 11.164,14.707 h1.02
Top Assembly:
  text "0.43 mm" at 62.306,17.247 h1.52
  text "0.175 mm" at 62.078,9.576 h1.52
  text "0.43 mm" at 62.916,2.515 h1.52
Board Outline:
  the board outline again, w0.254
Manufacturing Notes:
  lines w0.254: 21.905,-18.5 21.905,38.759 ; 21.905,-14.56 81.627,-14.56 ; 21.905,-10.771 81.627,-10.771 ; 21.905,-10.75 81.627,-10.75 ; 21.905,-6.961 81.627,-6.961 ; 21.905,0.659 81.627,0.659 ; 35.875,-18.5 35.875,38.759 ; 35.875,-10.771 48.575,-10.771 ; 35.875,-3.151 48.575,-3.151 ; 48.575,-18.5 48.575,38.759 ; 54.957,-18.37 67.657,-18.37 ; 54.957,-10.75 67.657,-10.75 ; 58.735,-18.5 58.735,38.759 ; 58.735,-3.151 72.705,-3.151 ; 72.705,-18.5 72.705,38.759 ; 80.127,38.759 81.627,38.759 ; 81.595,-18.5 81.595,38.759 81.595,42.569 ; 81.627,4.469 21.905,4.469 21.905,8.279 81.627,8.279 ; 81.627,12.089 21.905,12.089 21.905,15.899 81.627,15.899 ; 81.627,19.709 21.905,19.709 21.905,23.519 81.627,23.519 ; 81.627,27.329 21.905,27.329 21.905,31.139 81.627,31.139 ; 81.627,34.949 21.905,34.949 21.905,38.759 ; 81.627,42.569 21.905,42.569 21.905,38.759 ; 21.905,38.759 35.875,38.759 ; 21.905,38.759 81.627,38.759 ; 35.875,38.759 35.875,42.569 48.575,42.569 48.575,38.759 ; 48.575,38.759 58.735,38.759 ; 48.575,38.759 58.735,38.759 ; 58.735,38.759 58.735,42.569 72.705,42.569 72.705,38.759 ; 72.705,38.759 81.627,38.759 ; 72.705,38.759 81.627,38.759 ; 21.905,-18.37 81.627,-18.37 21.905,-18.37 ; 21.905,-3.151 81.627,-3.151 21.905,-3.151
  text "Type" at 25.969,40.315 h1.52
  text "Material" at 39.431,40.315 h1.52
  text "Weight" at 51.623,40.315 h1.52
  text "Dk" at 76.515,40.315 h1.52
  text "Thickness" at 62.291,40.283 h1.52
  text "Top Overlay" at 23.599,36.219 h1.52
  text "0.01 mm" at 62.306,32.486 h1.52
  text "3.5" at 75.921,32.435 h1.52
  text "Top Solder" at 23.599,32.394 h1.52
  text "0.0175 mm" at 61.874,29.718 h1.52
  text "0.5 oz" at 51.918,29.032 h1.52
  text "Top Layer" at 23.599,28.599 h1.52
  text "(Plating to 1 oz)" at 60.935,27.915 h1.52
  text "2116 RC58%" at 38.049,25.07 h1.52
  text "0.1195 mm" at 62.611,24.968 h1.52
  text "4.45" at 75.87,24.968 h1.52
  text "Dielectric 1" at 24.054,24.882 h1.52
  text "Second Layer" at 23.876,21.198 h1.52
  text "1 oz" at 51.765,21.031 h1.52
  text "0.035 mm" at 62.027,20.904 h1.52
  text "Core 1" at 24.054,17.424 h1.52
  text "Core" at 40.294,17.439 h1.52
  text "4.6" at 76.048,17.17 h1.52
  text "1 oz" at 51.714,13.437 h1.52
  text "0.035 mm" at 62.459,13.385 h1.52
  text "Third Layer" at 23.599,13.359 h1.52
  text "Dielectric 2" at 23.622,9.718 h1.52
  text "4.74" at 75.251,9.647 h1.52
  text "7628 RC 46%" at 38.354,9.601 h1.52
  text "1 oz" at 51.475,6.016 h1.52
  text "0.035 mm" at 62.22,5.965 h1.52
  text "Fourth Layer" at 23.599,5.739 h1.52
  text "Core 2" at 24.209,2.141 h1.52
  text "Core" at 40.411,2.032 h1.52
  text "4.6" at 76.225,1.879 h1.52
  text "Fifth Layer" at 24.148,-1.691 h1.52
  text "1 oz" at 51.831,-1.985 h1.52
  text "0.035 mm" at 62.575,-2.036 h1.52
  text "Dielectric 3" at 24.209,-5.656 h1.52
  text "0.1195 mm" at 62.357,-5.69 h1.52
  text "2116 RC58%" at 38.379,-5.766 h1.52
  text "4.45" at 75.438,-5.792 h1.52
  text "0.0175 mm" at 62.332,-8.433 h1.52
  text "0.5 oz" at 51.867,-9.296 h1.52
  text "Sixth Layer" at 24.098,-9.311 h1.52
  text "(Plating to 1 oz)" at 60.35,-9.982 h1.52
  text "Bottom Solder" at 23.444,-12.878 h1.52
  text "3.5" at 75.819,-12.954 h1.52
  text "0.01 mm" at 63.246,-13.513 h1.52
  text "Bottom Overlay" at 23.495,-16.713 h1.52